# Altium PCB PCB1_topoverly.PcbDoc
Units mil, origin at the board's own origin, x right, y up, seen from the top; angles counter-clockwise.
Board outline 6000 x 4000 mil, 2 copper layers (Top Layer, Bottom Layer); 93 components, 0 nets, 234 pads, 0 vias.
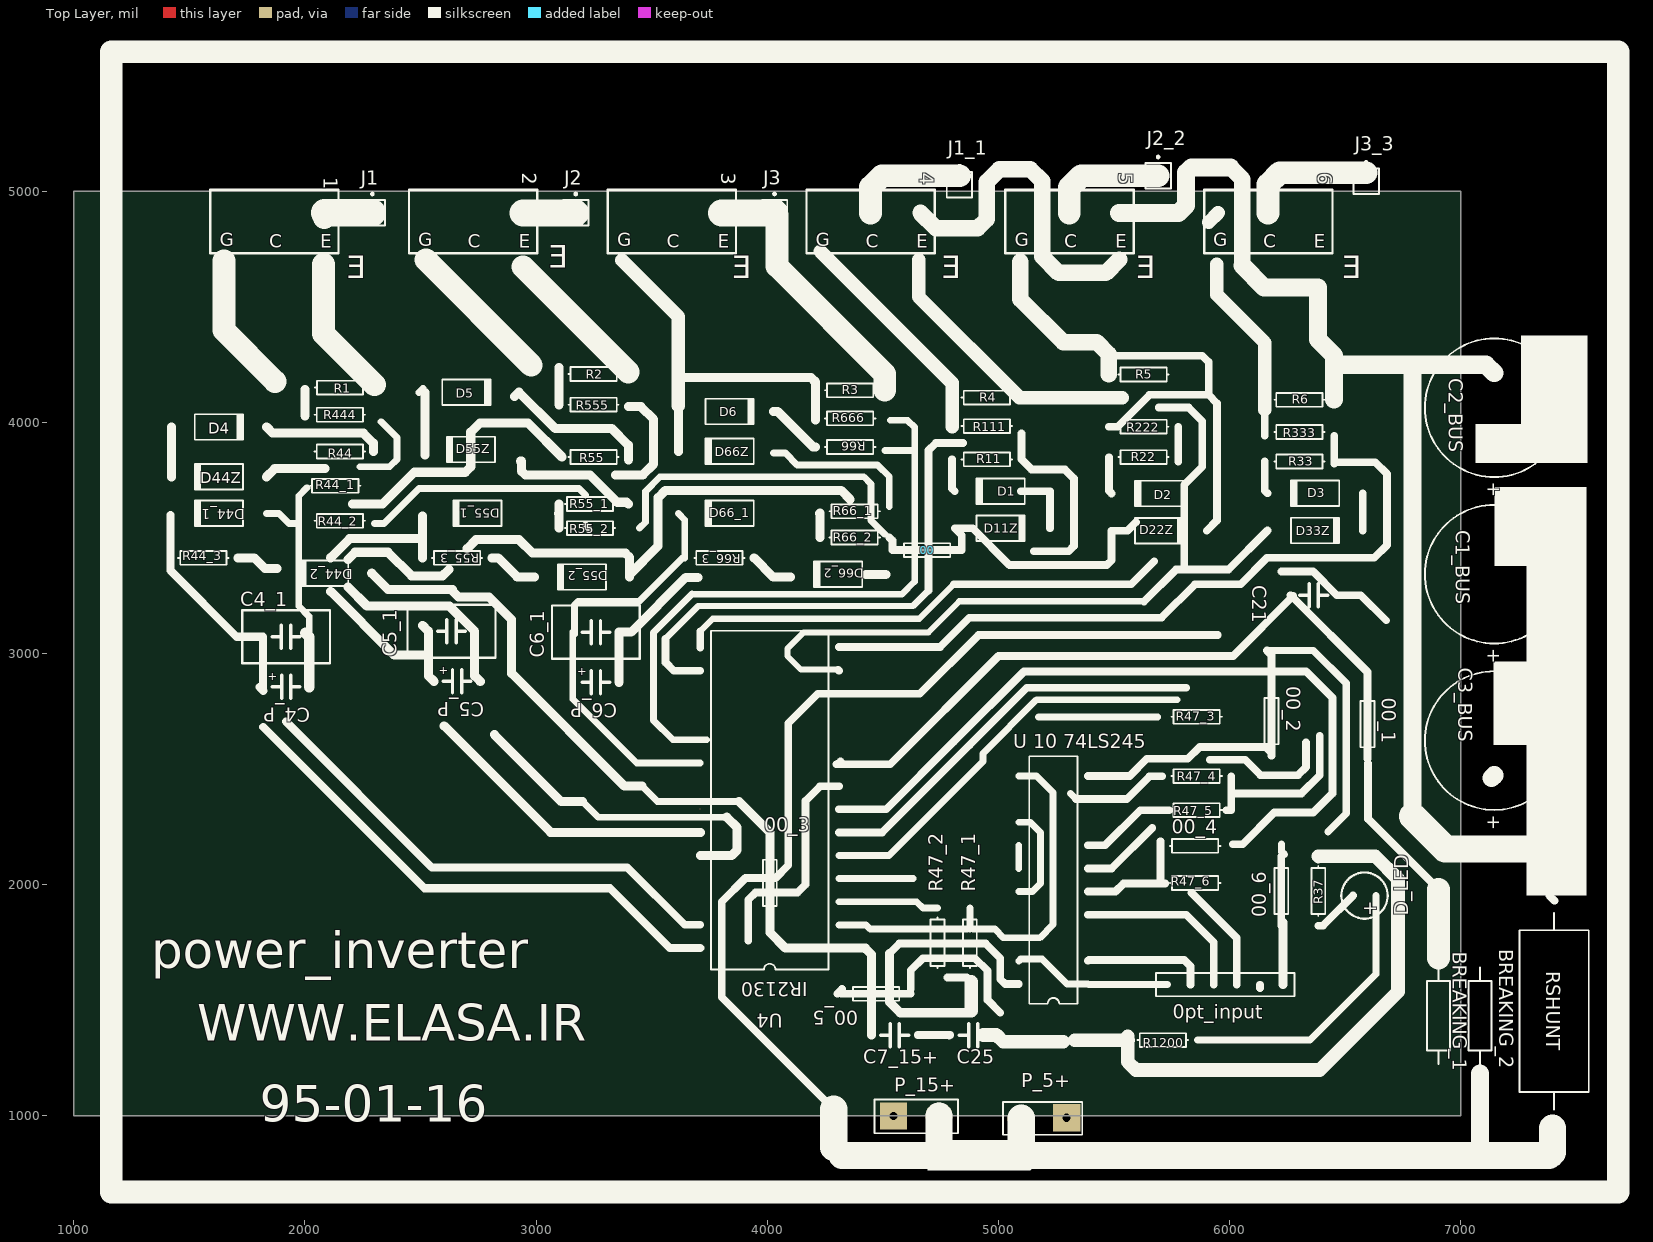
[diagram p0: Top Layer view]
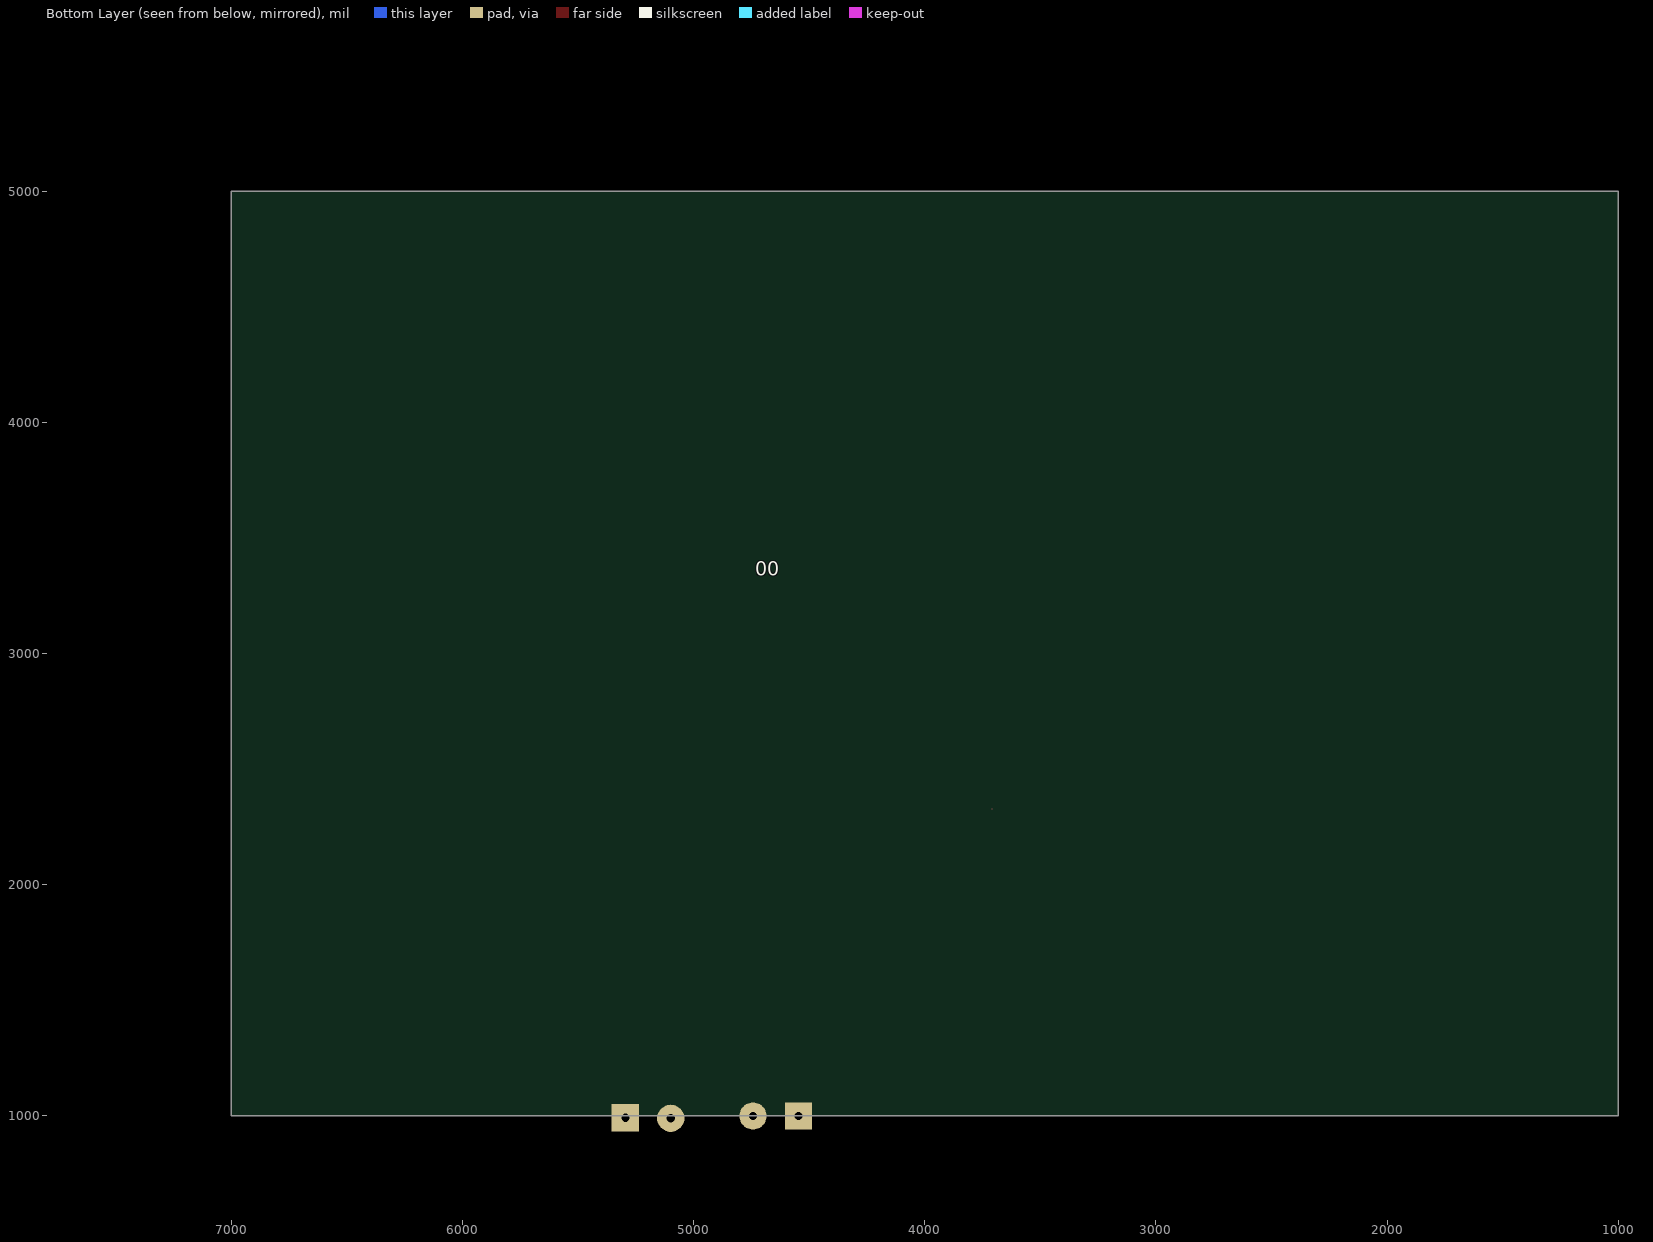
[diagram p1: Bottom Layer view, seen from below]

## Layer stack, top to bottom
Top Layer: signal copper 1.4
Dielectric: dielectric 12.6, FR-4, Dk 4.8
Bottom Layer: signal copper 1.4

## Board outline
1000,1000 7000,1000 7000,5000 1000,5000

## Design rules (kind name [scope] priority, off if disabled: settings)
Clearance [All] p1: gap=10
PolygonConnect [All] p1: connectstyle=Relief reliefconductorwidth=10 reliefentries=4 polygonreliefangle="90 Angle"
RoomDefinition inv_sh_shoheil_74ls245 [InComponentClass('inv_sh_shoheil_74ls245')] p1: confinementstyle=ConfineIn formatcopy=TRUE lockcomponents=FALSE outline 7957.48,2367.8 8339.35,2367.8 8339.35,2501.65 7957.48,2501.65
RoutingVias [All] p1: holewidth=28 width=50 viastyle="Through Hole" minholewidth=28 minwidth=50 maxholewidth=28 maxwidth=50
SilkscreenOverComponentPads [All] p1: minsilkscreentomaskgap=10
SolderMaskExpansion [All] p1: expansion=4
Width [All] p1: maxlimit=10 minlimit=10 preferedwidth=10
27 further rules are at their usual default settings.

## Components (designator, comment, footprint, x,y, rotation, side; value= is the part's Value field where it differs from the comment)
00 "Res1" AXIAL-0.3#1 4691.65,3448.11 r180 top
00_1 "Res1" AXIAL-0.3#2 6597.01,2695.04 r90 top
00_2 "Res1" AXIAL-0.3#3 6181.89,2708.11 r90 top
00_3 "Res1" AXIAL-0.3#4 4011.65,2008.11 r90 top
00_4 "Res1" AXIAL-0.3#1 5851.65,2168.43 r180 top
00_5 "Res1" AXIAL-0.3#1 4471.65,1528.11 r180 top
00_6 "Res1" AXIAL-0.3#5 6224.25,1973.31 r90 top
0pt_input "Header 6" HDR1X6 6231.65,1568.11 r180 top
1 "igbt_20n50" 20N50_S#1 1320.43,4891.89 r0 top
2 "igbt_20n50" 20N50_S#2 2180.43,4891.89 r0 top
3 "igbt_20n50" 20N50_S#2 3040.43,4891.89 r0 top
4 "igbt_20n50" 20N50_S#2 3900.43,4891.89 r0 top
5 "igbt_20n50" 20N50_S#2 4760.43,4891.89 r0 top
6 "igbt_20n50" 20N50_S#2 5620.43,4891.89 r0 top
BREAKING_1 "Res1" AXIAL-0.5 6904.25,1433.31 r270 top
BREAKING_2 "Res1" AXIAL-0.5 7084.25,1433.31 r90 top
C1_BUS "Cap Pol1" RB7.6-15 7145.59,3343.9 r270 top
C2_BUS "Cap Pol1" RB7.6-15 7145.59,4063.9 r270 top
C3_BUS "Cap Pol1" RB7.6-15 7145.59,2623.9 r270 top
C4_1 "Cap" C2B 1918.58,3072.99 r180 top
C4_P "Cap Pol1" CE2 1918.74,2855.98 r0 top
C5_1 "Cap" C2B 2634.17,3096.93 r180 top
C5_P "Cap Pol1" CE2 2658.43,2879.92 r0 top
C6_1 "Cap" C2B 3258.74,3093.46 r180 top
C6_P "Cap Pol1" CE2 3258.74,2876.46 r0 top
C7_15+ "Cap" C2#1 4551.65,1350 r0 top
C21 "Cap" C2#2 6364.25,3253.31 r0 top
C25 "Cap" C2#1 4891.65,1350 r180 top
D1 "Diode 1N4007" DIO10.46-5.3x2.8#1 5009.88,3703.07 r180 top
D2 "Diode 1N4007" DIO10.46-5.3x2.8#1 5696.02,3692.99 r180 top
D3 "Diode 1N4007" DIO10.46-5.3x2.8#1 6370.51,3693.62 r180 top
D4 "Diode 1N4007" DIO10.46-5.3x2.8#1 1627.99,3980.86 r0 top
D5 "Diode 1N4007" DIO10.46-5.3x2.8#1 2698.7,4130.47 r0 top
D6 "Diode 1N4007" DIO10.46-5.3x2.8#1 3837.28,4047.79 r0 top
D11Z "Diode 1N4007" DIO10.46-5.3x2.8#1 5009.88,3542.44 r0 top
D22Z "Diode 1N4007" DIO10.46-5.3x2.8#1 5696.02,3532.36 r0 top
D33Z "Diode 1N4007" DIO10.46-5.3x2.8#1 6370.51,3532.99 r0 top
D44_1 "Diode 1N4007" DIO10.46-5.3x2.8#1 1627.99,3607.01 r180 top
D44_2 "Diode 1N4007" DIO10.46-5.3x2.8#1 2083.31,3347.8 r180 top
D44Z "Diode 1N4007" DIO10.46-5.3x2.8#1 1627.99,3765.12 r180 top
D55_1 "Diode 1N4007" DIO10.46-5.3x2.8#1 2745.94,3607.01 r180 top
D55_2 "Diode 1N4007" DIO10.46-5.3x2.8#2 3198.7,3332.05 r180 top
D55Z "Diode 1N4007" DIO10.46-5.3x2.8#1 2718.39,3883.23 r180 top
D66_1 "Diode 1N4007" DIO10.46-5.3x2.8#1 3837.28,3607.01 r180 top
D66_2 "Diode 1N4007" DIO10.46-5.3x2.8#3 4306.93,3343.07 r180 top
D66Z "Diode 1N4007" DIO10.46-5.3x2.8#1 3837.28,3875.35 r180 top
D_LED "LED0" CE5 6584.25,1953.31 r180 top
J1 "Socket" PIN1#1 2291.65,4908.11 r0 top
J1_1 "Socket" PIN1#1 4831.65,5028.74 r0 top
J2 "Socket" PIN1#1 3171.65,4908.11 r0 top
J2_2 "Socket" PIN1#2 5691.65,5068.11 r0 top
J3 "Socket" PIN1#1 4031.65,4908.11 r0 top
J3_3 "Socket" PIN1#1 6591.65,5044.49 r0 top
P_5+ "Header 2" HDR1X2#1 5244.25,989.84 r180 top
P_15+ "Header 2" HDR1X2#2 4624.25,913.31 r0 top
R1 "Res1" AXIAL-0.3#1 2151.65,4151.1 r180 top
R2 "Res1" AXIAL-0.3#1 3249.09,4210.16 r180 top
R3 "Res1" AXIAL-0.3#2 4359.02,4139.29 r180 top
R4 "Res1" AXIAL-0.3#2 4950.04,4107.8 r180 top
R5 "Res1" AXIAL-0.3#2 5628.31,4207.95 r180 top
R6 "Res1" AXIAL-0.3#1 6302.8,4098.35 r180 top
R11 "Res1" AXIAL-0.3#2 4950.04,3840.71 r0 top
R22 "Res1" AXIAL-0.3#2 5628.31,3850.31 r0 top
R33 "Res1" AXIAL-0.3#1 6302.8,3831.26 r0 top
R37 "Res1" AXIAL-0.3#4 6384.25,1973.31 r270 top
R44 "Res1" AXIAL-0.3#1 2150.83,3874.41 r180 top
R44_1 "Res1" AXIAL-0.3#1 2131.14,3726.22 r0 top
R44_2 "Res1" AXIAL-0.3#1 2150.83,3574.72 r180 top
R44_3 "Res1" AXIAL-0.3#6 1560.28,3414.41 r180 top
R47_1 "Res1" AXIAL-0.3#4 4877.01,1749.37 r90 top
R47_2 "Res1" AXIAL-0.3#4 4737.01,1749.37 r90 top
R47_3 "Res1" AXIAL-0.3#1 5858.27,2726.85 r180 top
R47_4 "Res1" AXIAL-0.3#1 5858.27,2470.16 r180 top
R47_5 "Res1" AXIAL-0.3#1 5858.27,2323.07 r180 top
R47_6 "Res1" AXIAL-0.3#1 5851.65,2008.11 r180 top
R55 "Res1" AXIAL-0.3#1 3249.09,3850.79 r180 top
R55_1 "Res1" AXIAL-0.3#1 3233.35,3647.48 r0 top
R55_2 "Res1" AXIAL-0.3#1 3233.35,3543.23 r180 top
R55_3 "Res1" AXIAL-0.3#1 2658.54,3414.41 r180 top
R66 "Res1" AXIAL-0.3#2 4359.02,3894.1 r0 top
R66_1 "Res1" AXIAL-0.3#1 4378.39,3615.98 r0 top
R66_2 "Res1" AXIAL-0.3#1 4378.39,3502.68 r180 top
R66_3 "Res1" AXIAL-0.3#2 3793.19,3414.41 r180 top
R111 "Res1" AXIAL-0.3#2 4950.04,3984.33 r180 top
R222 "Res1" AXIAL-0.3#2 5628.31,3982.13 r180 top
R333 "Res1" AXIAL-0.3#1 6302.8,3959.13 r180 top
R444 "Res1" AXIAL-0.3#1 2150.83,4033.78 r180 top
R555 "Res1" AXIAL-0.3#1 3249.09,4077.09 r180 top
R666 "Res1" AXIAL-0.3#2 4359.02,4018.03 r180 top
R1200 "Res1" AXIAL-0.3#1 5711.65,1328.11 r0 top
RSHUNT "Res1" AXIAL-1.0 7404.25,1453.31 r90 top
U4 "IR21_30" IR2130 4388.19,2807.48 r180 top
"U 10 74LS245" "DM74LS245N" N20A 5238.43,2020.87 r90 top

## Footprints (in the part's own frame and the unit in brackets; to place one, negate y for a bottom-side part, rotate by r counter-clockwise, add the part's x,y. Pads: shape width x height; smd on the part's side, far side on the other; paste and mask are expansions set on the pad)
20N50_S#1 [mil]
  oval 90.55x196.85 on Top Overlay: 1(330,15)
  oval 90.55x157.48 on Top Overlay: 2(546.54,15) 3(763.07,15)
  silkscreen extent 270,-160 825,115
20N50_S#2 [mil]
  oval 90.55x157.48 on Top Overlay: 1(330,15) 2(546.54,15) 3(763.07,15)
  silkscreen extent 270,-160 825,115
AXIAL-0.3#1 [mm] "Axial Device, Thru-Hole; 2 Leads; 0.3 in Pin Spacing"
  oval 2.2x1.8 on Top Overlay: 1(-3.81,0) 2(3.81,0)
  silkscreen extent -2.77,-0.76 2.77,0.76
AXIAL-0.3#2 [mm] "Axial Device, Thru-Hole; 2 Leads; 0.3 in Pin Spacing"
  oval 2.3x1.8 on Top Overlay: 1(-3.81,0) 2(3.81,0)
  silkscreen extent -2.77,-0.76 2.77,0.76
AXIAL-0.3#3 [mm] "Axial Device, Thru-Hole; 2 Leads; 0.3 in Pin Spacing"
  oval 2.2x1.9 on Top Overlay: 1(-3.81,0) 2(7.856,0.1)
  silkscreen extent -2.77,-0.76 2.77,0.76
AXIAL-0.3#4 [mm] "Axial Device, Thru-Hole; 2 Leads; 0.3 in Pin Spacing"
  oval 2.2x1.9 on Top Overlay: 1(-3.81,0) 2(3.81,0)
  silkscreen extent -2.77,-0.76 2.77,0.76
AXIAL-0.3#5 [mm] "Axial Device, Thru-Hole; 2 Leads; 0.3 in Pin Spacing"
  round 2.2 on Top Overlay: 1(-3.81,0) 2(3.81,0)
  silkscreen extent -2.77,-0.76 2.77,0.76
AXIAL-0.3#6 [mm] "Axial Device, Thru-Hole; 2 Leads; 0.3 in Pin Spacing"
  oval 3x2.3 on Top Overlay: 1(-3.81,0) 2(3.81,0)
  silkscreen extent -2.77,-0.76 2.77,0.76
AXIAL-0.5 [mm] "Axial Device, Thru-Hole; 2 Leads; 0.5 in Pin Spacing"
  oval 4x2.5 on Top Overlay: 1(-6.35,0) 2(6.35,0)
  silkscreen extent -5.33,-1.27 5.33,1.27
AXIAL-1.0 [mm] "Axial Device, Thru-Hole; 2 Leads; 1.0 in Pin Spacing"
  round 5 on Top Overlay: 1(-12.7,0) 2(12.7,0)
  silkscreen extent -10.79,-3.81 10.79,3.81
C2#1 [mil]
  round 80 on Top Overlay: 1(-100,0) 2(100,0)
  silkscreen extent -60,-50 60,50
C2#2 [mil]
  round 90.55 on Top Overlay: 1(-100,0) 2(100,0)
  silkscreen extent -60,-50 60,50
C2B [mm]
  oval 2.3x3 on Top Overlay: 1(-2.54,0) 2(2.54,0)
  silkscreen extent -4.83,-2.92 4.83,2.92
CE2 [mil]
  oval 90.55x118.11 on Top Overlay: 1(-100,0) 2(100,0)
  silkscreen extent -60,-50 60,50
CE5 [mil]
  round 80 on Top Overlay: 1(-50,0) 2(50,0)
  silkscreen extent -100,-100 100,100
DIO10.46-5.3x2.8#1 [mm] "Diode, Axial; Body 5.2 x 2.7 mm (LxDia. max), Lead Dia. 0.86 mm (max)"
  oval 3x2.3 on Top Overlay: 1(-5.23,0)
  rect 3x2.3 on Top Overlay: 2(5.23,0)
  silkscreen extent -2.65,-1.41 2.75,1.4
DIO10.46-5.3x2.8#2 [mm] "Diode, Axial; Body 5.2 x 2.7 mm (LxDia. max), Lead Dia. 0.86 mm (max)"
  round 2.3 on Top Overlay: 1(-5.23,0)
  rect 2.5x2.3 on Top Overlay: 2(5.23,0)
  silkscreen extent -2.65,-1.4 2.75,1.4
DIO10.46-5.3x2.8#3 [mm] "Diode, Axial; Body 5.2 x 2.7 mm (LxDia. max), Lead Dia. 0.86 mm (max)"
  oval 3x2 on Top Overlay: 1(-5.23,0)
  rect 3x2.3 on Top Overlay: 2(5.23,0)
  silkscreen extent -2.65,-1.4 2.75,1.4
HDR1X2#1 [mm] "Connector; Header; 2 Position"
  rect 3x3 hole 0.9: 1(-1.304,-0.064)
  round 3 hole 0.9: 2(3.684,0)
  silkscreen extent -3.02,-1.8 5.68,1.82
HDR1X2#2 [mm] "Connector; Header; 2 Position"
  rect 3x3 hole 0.9: 1(-1.976,2.196)
  round 3 hole 0.9: 2(3.024,2.196)
  silkscreen extent -4.08,0.3 5.12,4
HDR1X6 [mm] "Connector; Header; 6 Position"
  rect 1.7x3 on Top Overlay: 1(0,0)
  oval 1.7x3 on Top Overlay: 2(2.54,0) 3(5.08,0) 4(7.62,0) 5(10.16,0) 6(12.7,0)
  silkscreen extent -1.27,-1.27 13.97,1.27
IR2130 [mm]
  rect 2.5x1.6 on Top Overlay: 1(1.969,27.453)
  oval 2.5x1.6 on Top Overlay: 2(1.969,24.913) 3(1.969,22.373) 4(1.969,19.833) 5(1.969,17.293) 6(1.969,14.753) 7(1.969,12.213) 8(1.969,9.673) 9(1.969,7.133) 10(1.969,4.593) 11(1.969,2.053) 12(1.969,-0.487) 13(1.969,-3.027) 14(1.969,-5.567) 15(17.209,-5.567) 16(17.209,-3.027) 17(17.209,-0.487) 18(17.209,2.053) 19(17.209,4.593) 20(17.209,7.133) 21(17.209,9.673) 23(17.209,14.753) 24(17.209,17.293) 25(17.209,19.833) 26(17.209,22.373) 27(17.209,24.913) 28(17.209,27.453)
  round 0.1 hole 0.1: 22(17.24,12.168)
  silkscreen extent 3.14,-7.4 16.04,29.82
N20A [mm] "DIP; 20 Leads; Row Spacing 7.62 mm; Pitch 2.54 mm"
  rect 1.7x2.5 on Top Overlay: 1(-11.43,-3.81)
  oval 1.7x2.5 on Top Overlay: 2(-8.89,-3.81) 3(-6.35,-3.81) 4(-3.81,-3.81) 5(-1.27,-3.81) 6(1.27,-3.81) 7(3.81,-3.81) 8(6.35,-3.81) 9(8.89,-3.81) 10(11.43,-3.81) 11(11.43,3.81) 12(8.89,3.81) 13(6.35,3.81) 14(3.81,3.81) 15(1.27,3.81) 16(-1.27,3.81) 17(-3.81,3.81) 18(-6.35,3.81) 19(-8.89,3.81) 20(-11.43,3.81)
  silkscreen extent -13.6,-2.65 13.6,2.65
PIN1#1 [mm] "Connector; Plug"
  rect 2.3x4 on Top Overlay: 1(0,0)
  silkscreen extent -1.4,-1.4 1.4,2.17
PIN1#2 [mm] "Connector; Plug"
  rect 1.5x1.5 on Top Overlay: 1(0,0)
  silkscreen extent -1.4,-1.4 1.4,2.17
RB7.6-15 [mm] "Polarized Capacitor (Radial); 2 Leads"
  rect 4x4 on Top Overlay: 1(3.81,0)
  round 4 on Top Overlay: 2(-3.81,0)
  silkscreen extent -7.62,-7.62 7.62,7.62

## Part data
00 00_1 00_2 00_3 00_4 00_5 00_6 BREAKING_1 BREAKING_2 R1 R2 R3 R4 R5 R6 R11 R22 R33 R37 R44 R44_1 R44_2 R44_3 R47_1 R47_2 R47_3 R47_4 R47_5 R47_6 R55 R55_1 R55_2 R55_3 R66 R66_1 R66_2 R66_3 R111 R222 R333 R444 R555 R666 R1200 RSHUNT: "Resistor"
0pt_input: "Header, 6-Pin"
C1_BUS C2_BUS C3_BUS C4_P C5_P C6_P: "Polarized Capacitor (Radial)"
C4_1 C5_1 C6_1 C7_15+ C21 C25: "Capacitor"
D1 D2 D3 D4 D5 D6 D11Z D22Z D33Z D44_1 D44_2 D44Z D55_1 D55_2 D55Z D66_1 D66_2 D66Z: "1 Amp General Purpose Rectifier"
D_LED: "Typical INFRARED GaAs LED"
P_5+ P_15+: "Header, 2-Pin"
"U 10 74LS245": "3-State Octal Bus Transceiver"

## Nets (pads, with @x,y where several pads share a name; then routed paths per layer and width w, separated by ;. In a path a pad name is that pad's centre, name@x,y a point inside that pad or via, vN(x,y) a via of type N, cw(c..) or ccw(c..) an arc to the next point about the centre after c; other vN are vias at no path point)
pads on no net: 00.1 00.2 00_1.1 00_1.2 00_2.1 00_2.2 00_3.1 00_3.2 00_4.1 00_4.2 00_5.1 00_5.2 00_6.1 00_6.2 0pt_input.1 0pt_input.2 0pt_input.3 0pt_input.4 0pt_input.5 0pt_input.6 1.1 1.2 1.3 2.1 2.2 2.3 3.1 3.2 3.3 4.1 4.2 4.3 5.1 5.2 5.3 6.1 6.2 6.3 "U 10 74LS245.1" "U 10 74LS245.2" "U 10 74LS245.3" "U 10 74LS245.4" "U 10 74LS245.5" "U 10 74LS245.6" "U 10 74LS245.7" "U 10 74LS245.8" "U 10 74LS245.9" "U 10 74LS245.10" "U 10 74LS245.11" "U 10 74LS245.12" "U 10 74LS245.13" "U 10 74LS245.14" "U 10 74LS245.15" "U 10 74LS245.16" "U 10 74LS245.17" "U 10 74LS245.18" "U 10 74LS245.19" "U 10 74LS245.20" BREAKING_1.1 BREAKING_1.2 BREAKING_2.1 BREAKING_2.2 C1_BUS.1 C1_BUS.2 C2_BUS.1 C2_BUS.2 C3_BUS.1 C3_BUS.2 C4_1.1 C4_1.2 C4_P.1 C4_P.2 C5_1.1 C5_1.2 C5_P.1 C5_P.2 C6_1.1 C6_1.2 C6_P.1 C6_P.2 C7_15+.1 C7_15+.2 C21.1 C21.2 C25.1 C25.2 D1.1 D1.2 D2.1 D2.2 D3.1 D3.2 D4.1 D4.2 D5.1 D5.2 D6.1 D6.2 D11Z.1 D11Z.2 D22Z.1 D22Z.2 D33Z.1 D33Z.2 D44_1.1 D44_1.2 D44_2.1 D44_2.2 D44Z.1 D44Z.2 D55_1.1 D55_1.2 D55_2.1 D55_2.2 D55Z.1 D55Z.2 D66_1.1 D66_1.2 D66_2.1 D66_2.2 D66Z.1 D66Z.2 D_LED.1 D_LED.2 J1.1 J1_1.1 J2.1 J2_2.1 J3.1 J3_3.1 P_5+.1 P_5+.2 P_15+.1 P_15+.2 R1.1 R1.2 R2.1 R2.2 R3.1 R3.2 R4.1 R4.2 R5.1 R5.2 R6.1 R6.2 R11.1 R11.2 R22.1 R22.2 R33.1 R33.2 R37.1 R37.2 R44.1 R44.2 R44_1.1 R44_1.2 R44_2.1 R44_2.2 R44_3.1 R44_3.2 R47_1.1 R47_1.2 R47_2.1 R47_2.2 R47_3.1 R47_3.2 R47_4.1 R47_4.2 R47_5.1 R47_5.2 R47_6.1 R47_6.2 R55.1 R55.2 R55_1.1 R55_1.2 R55_2.1 R55_2.2 R55_3.1 R55_3.2 R66.1 R66.2 R66_1.1 R66_1.2 R66_2.1 R66_2.2 R66_3.1 R66_3.2 R111.1 R111.2 R222.1 R222.2 R333.1 R333.2 R444.1 R444.2 R555.1 R555.2 R666.1 R666.2 R1200.1 R1200.2 RSHUNT.1 RSHUNT.2 U4.1 U4.2 U4.3 U4.4 U4.5 U4.6 U4.7 U4.8 U4.9 U4.10 U4.11 U4.12 U4.13 U4.14 U4.15 U4.16 U4.17 U4.18 U4.19 U4.20 U4.21 U4.22 U4.23 U4.24 U4.25 U4.26 U4.27 U4.28

## Polygon pours and split planes (outlines as drawn)
no net on Top Overlay "Keep-Out Layer-No Net" (solid): 5158.27,895.35 4701.57,895.35 4689.76,883.54 4693.7,879.61 4693.7,765.43 5138.58,765.43 5142.52,769.37 5177.95,804.8 5177.95,816.61 5158.27,836.3 5158.27,895.35

## Silkscreen, mask and mechanical layers (free items; w line width, h text height)
Top Overlay:
  drawing of 557 lines, arcs and shapes, not listed
  text "E" at 3140,4670 h98.43
  text "E" at 2264.57,4623.7 h98.43
  text "E" at 3933.86,4623.7 h98.43
  text "E" at 4839.37,4623.7 h98.43
  text "E" at 5681.89,4623.7 h98.43
  text "E" at 6571.65,4623.7 h98.43
  text "power_inverter" at 1335,1640 h157.48
  text "WWW.ELASA.IR" at 1535,1325 h157.48
  text "95-01-16" at 1805,975 h157.48

## Text inside footprints (layer, text, board x,y; h text height)
1: Top Overlay "G" at 1630.43,4761.89 h59.06; Top Overlay "C" at 1845.43,4756.89 h59.06; Top Overlay "E" at 2065.43,4756.89 h59.06
2: Top Overlay "G" at 2490.43,4761.89 h59.06; Top Overlay "C" at 2705.43,4756.89 h59.06; Top Overlay "E" at 2925.43,4756.89 h59.06
3: Top Overlay "G" at 3350.43,4761.89 h59.06; Top Overlay "C" at 3565.43,4756.89 h59.06; Top Overlay "E" at 3785.43,4756.89 h59.06
4: Top Overlay "G" at 4210.43,4761.89 h59.06; Top Overlay "C" at 4425.43,4756.89 h59.06; Top Overlay "E" at 4645.43,4756.89 h59.06
5: Top Overlay "G" at 5070.43,4761.89 h59.06; Top Overlay "C" at 5285.43,4756.89 h59.06; Top Overlay "E" at 5505.43,4756.89 h59.06
6: Top Overlay "G" at 5930.43,4761.89 h59.06; Top Overlay "C" at 6145.43,4756.89 h59.06; Top Overlay "E" at 6365.43,4756.89 h59.06
C1_BUS: Top Overlay "+" at 7116.58,3023.74 h59.06 r270
C2_BUS: Top Overlay "+" at 7116.58,3743.74 h59.06 r270
C3_BUS: Top Overlay "+" at 7116.58,2303.74 h59.06 r270
C4_P: Top Overlay "+" at 1838.74,2885.98 h36
C5_P: Top Overlay "+" at 2578.43,2909.92 h36
C6_P: Top Overlay "+" at 3178.74,2906.46 h36
D_LED: Top Overlay "+" at 6644.25,1923.31 h60 r180
U4: Top Overlay "IR2130" at 4175.59,1579.13 h60 r180